# Altium PCB HGD_MCU(v0.1)-20200807.PcbDoc
Units mm, origin at the board's own origin, x right, y up, seen from the top; angles counter-clockwise.
Board outline 57.5 x 62.5 mm, 2 copper layers (TopLayer, BottomLayer); 55 components, 43 nets, 248 pads, 448 vias.
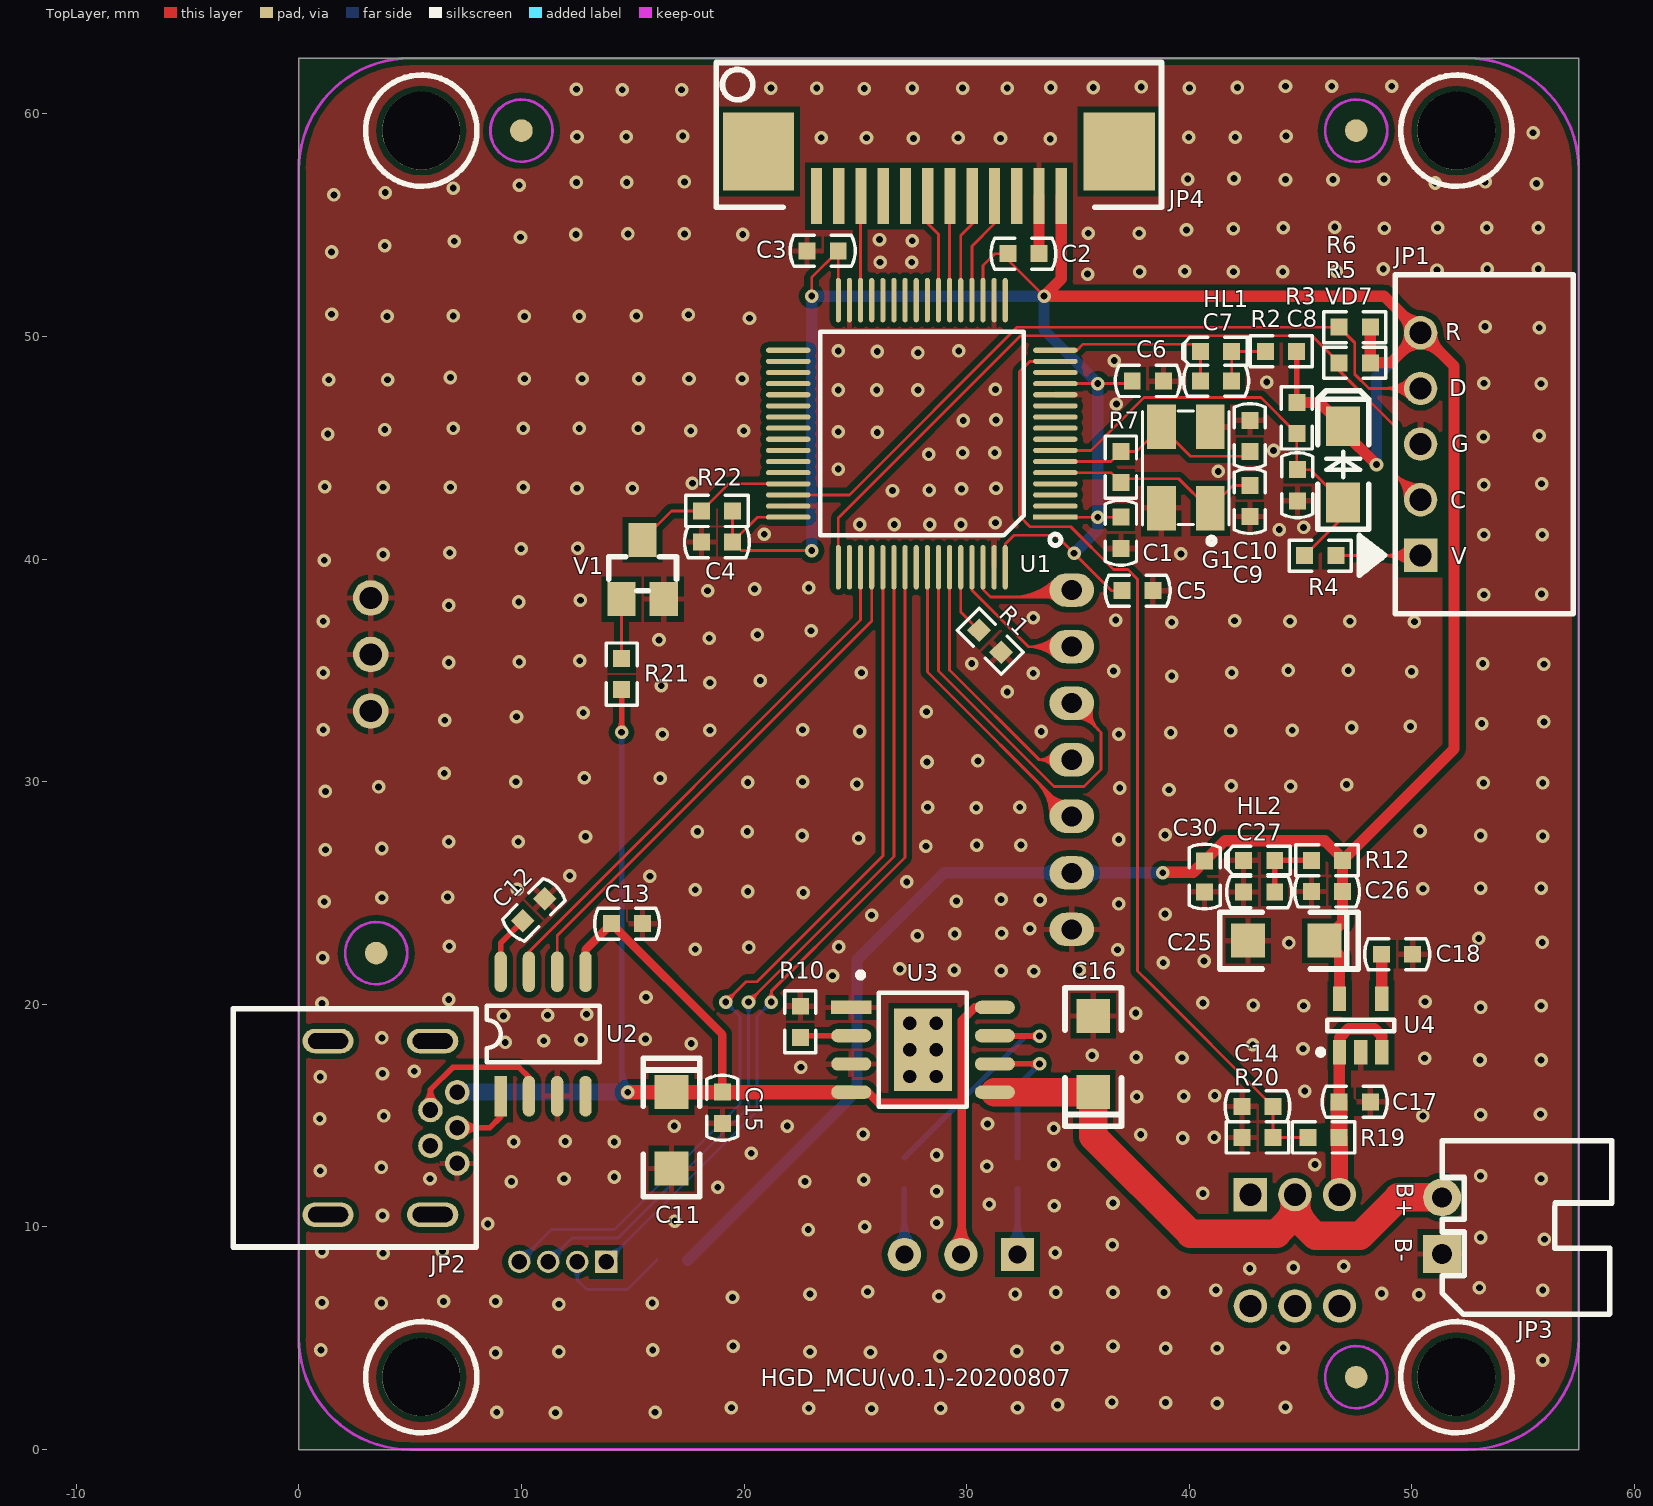
[diagram p0: TopLayer view]
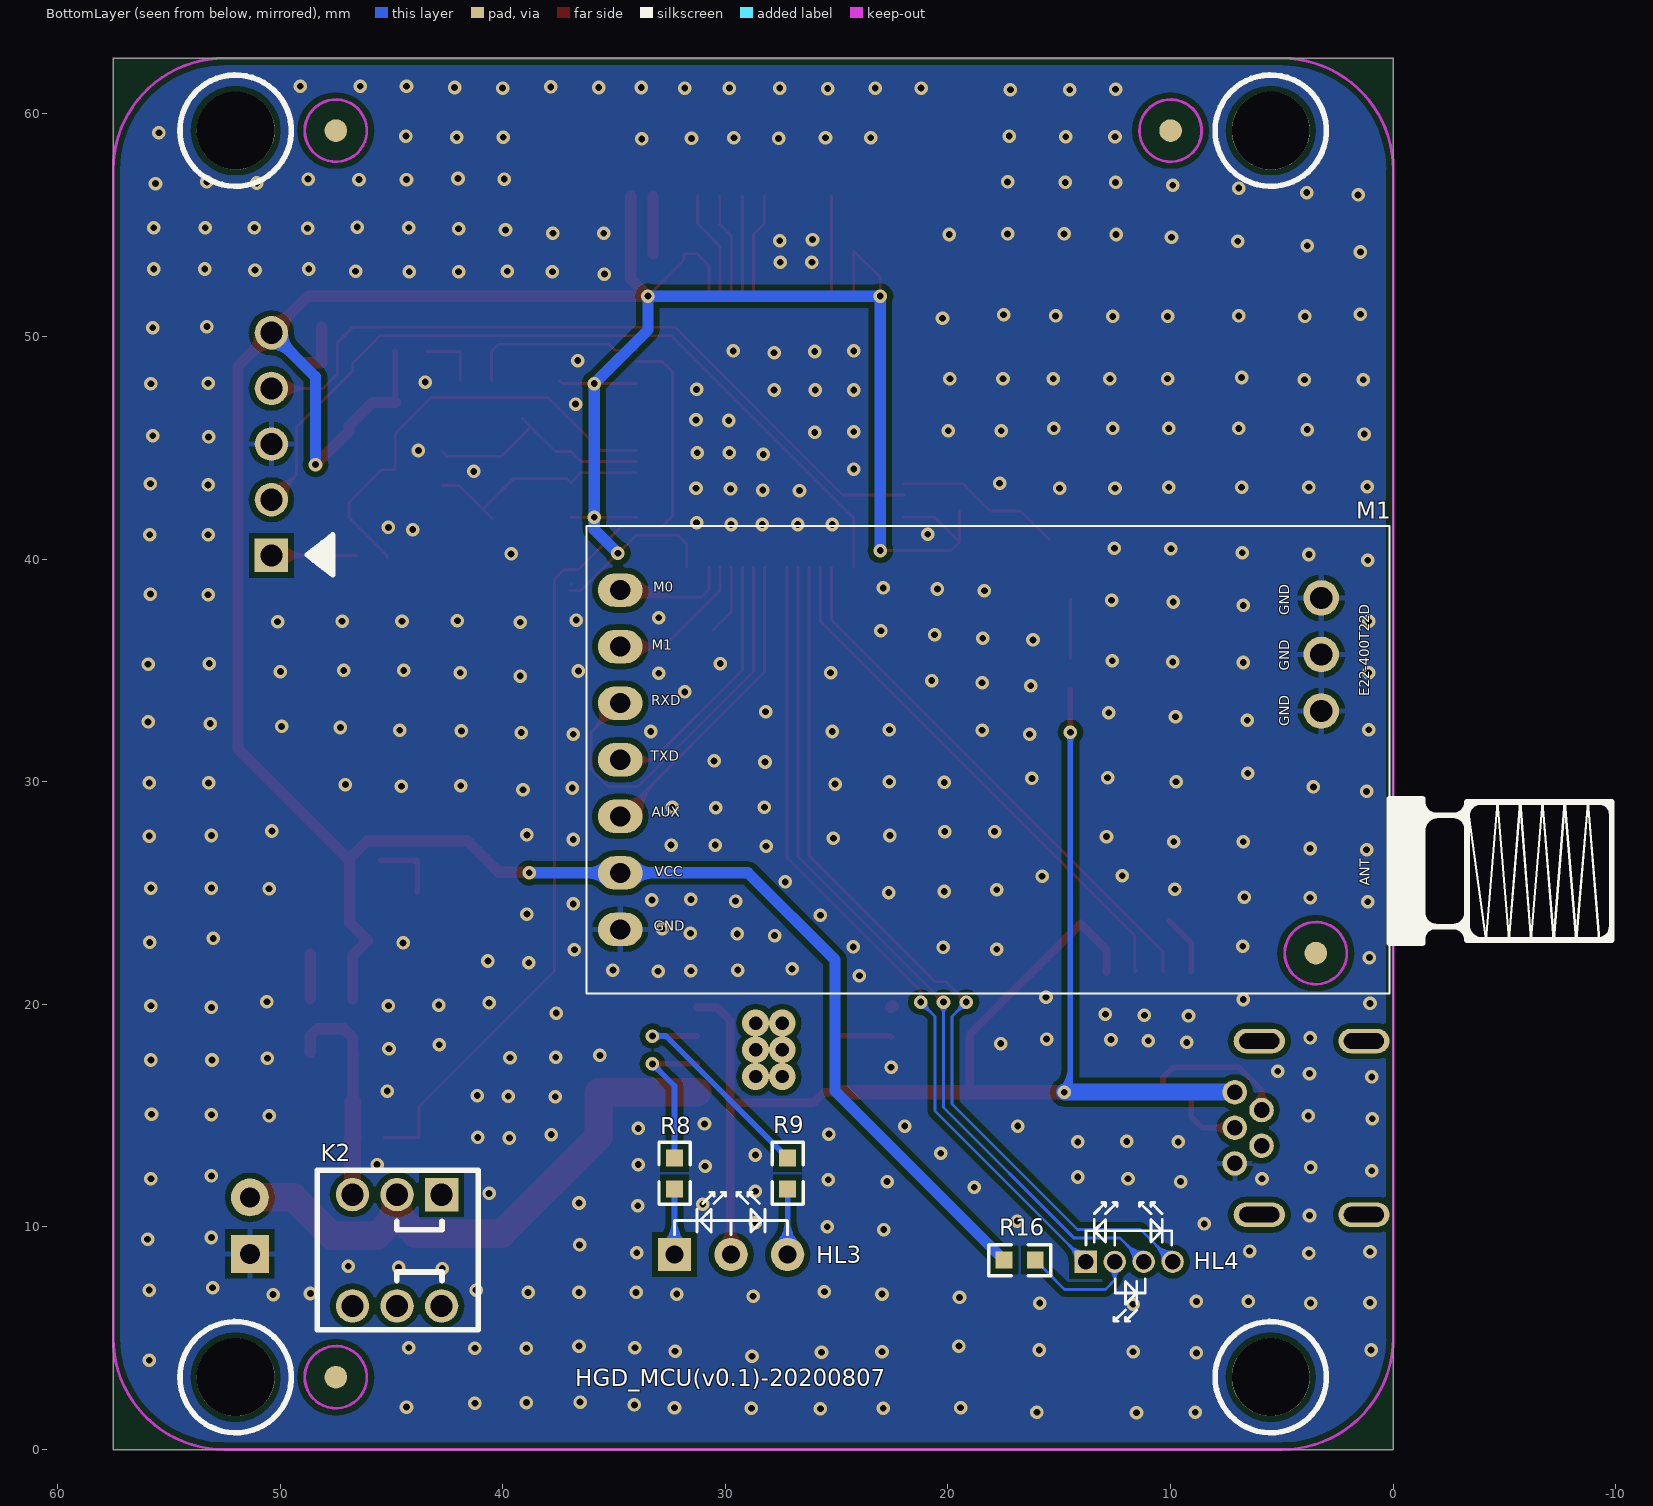
[diagram p1: BottomLayer view, seen from below]

## Layer stack, top to bottom
TopLayer: signal copper 0.0356
Dielectric: core 0.32, FR-4, Dk 4.8
BottomLayer: signal copper 0.0356

## Board outline
0,0 57.5,0 57.5,62.5 0,62.5 0,0

## Design rules (kind name [scope] priority, off if disabled: settings)
Clearance Clearance_2 [InNet('RF_IN') vs InNet('GND')] p1: gap=0.5
Clearance [All] p2: gap=0.254
Clearance Clearance_1 [All] p3: gap=0.254
ComponentClearance [All] p1 off: gap=0.254 collisioncheckmode=3 verticalgap=0.254 showdistances=FALSE
FabricationTestPointUsage TestPointUsage [All] p1: valid=0 allowmultiple=FALSE
FabricationTestpoint Testpoint [(IsPad And (OnTopLayer Or OnBottomLayer))] p1: side=3 testpointundercomponent=TRUE minsize=1.016 maxsize=2.54 preferedsize=1.524 minholesize=0.508 maxholesize=1.016 preferedholesize=0.813 testpointgrid=0.025 allowsidetop=TRUE allowsidebottom=TRUE usegrid=TRUE gridtolerance=0
HoleSize [All] p1: absolutevalues=TRUE maxlimit=5.08 minlimit=0.025 maxpercent=80.000 minpercent=20.000
PolygonConnect [IsVia] p1: connectstyle=Direct reliefconductorwidth=0.254 reliefentries=4 polygonreliefangle="90 Angle"
PolygonConnect PolygonConnect_via [All] p2 off: connectstyle=Relief reliefconductorwidth=0.254 reliefentries=4 polygonreliefangle="90 Angle"
RoutingVias [All] p1: holewidth=0.4 width=0.8 viastyle="Through Hole" minholewidth=0.3 minwidth=0.6 maxholewidth=0.5 maxwidth=1
ShortCircuit [All] p1 off: allowed=FALSE
SilkscreenOverComponentPads [All] p1: minsilkscreentomaskgap=0.254
SolderMaskExpansion [All] p1: expansion=0.102
Width [All] p1: maxlimit=2.54 minlimit=0.127 preferedwidth=0.254
22 further rules are at their usual default settings.

## Components (designator, comment, footprint, x,y, rotation, side; value= is the part's Value field where it differs from the comment)
C1 "100nF/25V/5%" C0603 36.932,40.488 r90 top
C2 "100nF/25V/5%" C0603 31.852,53.721 r0 top
C3 "100nF/25V/5%" C0603 24.232,53.848 r180 top
C4 "100nF/25V/5%" C0603 18.085,40.767 r0 top
C5 "100nF/25V/5%" C0603 38.379,38.583 r180 top
C6 "100nF/25V/5%" C0603 38.837,48.006 r180 top
C7 "100nF/25V/5%" C0603 41.906,48.012 r180 top
C8 "100nF/25V/5%" C0603 44.856,44.018 r270 top
C9 "20pF/25V/1%" C0603 42.723,41.91 r90 top
C10 "20pF/25V/1%" C0603 42.723,44.831 r90 top
C11 "10uF/25V/5%" C1206-1 16.739,16.053 r270 top
C12 "100nF/25V/5%" C0603 11.049,24.74 r225 top
C13 "100nF/25V/5%" C0603 14.046,23.622 r0 top
C14 "100nF/25V/5%" C0603 43.764,15.418 r180 top
C15 "100nF/25V/5%" C0603 19.025,16.053 r270 top
C16 "10uF/25V/5%" C1206-1 35.687,16.053 r90 top
C17 "100nF/25V/5%" C0603 46.736,15.621 r0 top
C18 "10nF/25V/5%" C0603 50.038,22.25 r180 top
C25 "2.2uF/25V/5%" C1206-1 46.076,22.86 r180 top
C26 "100nF/25V/5%" C0603 45.491,25.07 r0 top
C27 "100nF/25V/5%" C0603 43.84,25.044 r180 top
C30 "100nF/25V/5%" C0603 40.691,25.044 r90 top
G1 "16MHz" OSC5032 40.945,42.291 r90 top
HL1 "LED蓝灯" LED0603 41.906,49.333 r180 top
HL2 "LED蓝灯" LED0603 43.84,26.467 r180 top
HL3 "LED双色" LED2_Common_Anode 32.283,8.763 r180 bottom locked
HL4 "LED3_RGB" LED3_Common_Anode 13.806,8.433 r180 bottom
JP1 "SWD" XH2.54-5AW 50.394,37.668 r90 top
JP2 "MiniUSB-B" MiniUSB-B 7.112,14.453 r270 top locked
JP3 "XH2.54-2P" XH2.54-2AW 51.359,10.058 r90 top
JP4 "FPC-12P" FPC-1.0MM-12P-W 28.753,56.312 r0 top locked
K2 "SW-2" BTN-7*7 42.748,6.452 r0 bottom locked
M1 "E22-400T22D" E22-400T22D 34.722,38.608 r180 bottom locked
R1 "10K/5%" R0603 31.547,35.814 r135 top
R2 "10K/5%" R0603 44.827,49.333 r180 top
R3 "10K/5%" R0603 44.831,45.644 r90 top
R4 "1K/5%" R0603 46.584,40.157 r180 top
R5 "10K/5%" R0603 46.736,48.819 r0 top
R6 "10K/5%" R0603 46.736,50.419 r0 top
R7 "1M/1%" R0603 36.932,43.434 r90 top
R8 "1K/5%" R0603 32.283,13.106 r270 bottom
R9 "1K/5%" R0603 27.203,13.106 r270 bottom
R10 "1K5/5%" R0603 22.53,19.914 r270 top
R12 "2K/5%" R0603 46.888,26.467 r180 top
R16 "10K/5%" R0603 17.475,8.509 r180 bottom
R19 "10M/1%" R0603 46.736,14.021 r180 top
R20 "10M/1%" R0603 43.764,14.021 r180 top
R21 "10K/5%" R0603 14.503,35.535 r270 top
R22 "1K/5%" R0603 19.482,42.164 r180 top
U1 "STM32F105RCT6" LQFP64_STM32F105R 33.985,41.885 r180 top locked
U2 "CH340N" CH340N_SOP8 9.068,15.875 r0 top
U3 "TP4056" TP4056_SOP8_SOP127P600X175-8N 28.042,17.958 r0 top
U4 "TPS73033DBVR" SGM2019_SOT23-5_95P280X125-5N 47.701,19.05 r90 top
V1 "S8050" SOT-23 15.443,40.869 r0 top
VD7 "1N4148" LL-34 46.914,42.545 r90 top

## Footprints (in the part's own frame and the unit in brackets; to place one, negate y for a bottom-side part, rotate by r counter-clockwise, add the part's x,y. Pads: shape width x height; smd on the part's side, far side on the other; paste and mask are expansions set on the pad)
BTN-7*7 [mm] "自锁开关"
  rect 1.5x1.5 hole 1: 1(0,-5)
  round 1.5 hole 1: 2(2,-5) 3(4,-5) 4(0,0) 5(2,0) 6(4,0)
  silkscreen extent -1.65,-6.1 5.59,1.07
C0603 [mil]
  rect 30x30 smd: 1(0,0) 2(55,0)
  silkscreen extent -30,-28 85,28
C1206-1 [mil] "C1206封装钽电容"
  rect 60x60 smd: 1(0,0) 2(135,0)
  silkscreen extent -60,-50 185,50
CH340N_SOP8 [mil]
  rect 22x72 smd: 1(0,0)
  oval 22x72 smd: 2(50,0) 3(100,0) 4(150,0) 5(150,220) 6(100,220) 7(50,220) 8(0,220)
  silkscreen extent -25,60 175,160
E22-400T22D [mm]
  oval 2x1.5 hole 0.9: 1(0,0) 2(0,-2.54) 3(0,-5.08) 4(0,-7.62) 5(0,-10.16) 6(0,-12.7) 7(0,-15.24)
  round 1.6 hole 1: 8(31.49,-5.43) 9(31.49,-2.89) 10(31.49,-0.35)
  silkscreen extent -1.51,-18.12 44.54,2.88
FPC-1.0MM-12P-W [mm] "FPC-1.0MM-12P-W：卧式，抽拉式上接，12P"
  rect 3.2x3.5 smd: 0(-8.1,2) 0(8.1,2)
  rect 0.5x2.5 smd: 1(-5.5,0) 2(-4.5,0) 3(-3.5,0) 4(-2.5,0) 5(-1.5,0) 6(-0.5,0) 7(0.5,0) 8(1.5,0) 9(2.5,0) 10(3.5,0) 11(4.5,0) 12(5.5,0)
  silkscreen extent -10,-0.5 10,6
LED2_Common_Anode [mm] "LED2_Common_Anode：双色3mm共阳极LED"
  rect 1.5x1.5 hole 0.8: 1(0,0)
  round 1.5 hole 0.8: 2(2.54,0) 3(5.08,0)
  silkscreen extent 0,0.89 5.08,2.79
LED3_Common_Anode [mm] "LED2_Common_Anode：三色5mm共阳极LED"
  rect 1x1 hole 0.7: 1(0,0)
  round 1 hole 0.7: 2(1.3,0) 3(2.6,0) 4(3.9,0)
  silkscreen extent 0,-2.67 3.86,2.67
LED0603 [mil]
  rect 30x30 smd: A(0,0) K(55,0)
  silkscreen extent -28,-25 87,25
LL-34 [mil] "开关二极管LL-34封装"
  rect 70x60 smd: A(0,0) K(135,0)
  silkscreen extent -48,-45 198,45
LQFP64_STM32F105R [mm]
  rect 2x0.229 smd: 1(0,0)
  oval 2x0.229 smd: 2(0,-0.5) 3(0,-1) 4(0,-1.5) 5(0,-2) 6(0,-2.5) 7(0,-3) 8(0,-3.5) 9(0,-4) 10(0,-4.5) 11(0,-5) 12(0,-5.5) 13(0,-6) 14(0,-6.5) 15(0,-7) 16(0,-7.5) 33(12,-7.5) 34(12,-7) 35(12,-6.5) 36(12,-6) 37(12,-5.5) 38(12,-5) 39(12,-4.5) 40(12,-4) 41(12,-3.5) 42(12,-3) 43(12,-2.5) 44(12,-2) 45(12,-1.5) 46(12,-1) 47(12,-0.5) 48(12,0)
  oval 0.229x2 smd: 17(2.25,-9.75) 18(2.75,-9.75) 19(3.25,-9.75) 20(3.75,-9.75) 21(4.25,-9.75) 22(4.75,-9.75) 23(5.25,-9.75) 24(5.75,-9.75) 25(6.25,-9.75) 26(6.75,-9.75) 27(7.25,-9.75) 28(7.75,-9.75) 29(8.25,-9.75) 30(8.75,-9.75) 31(9.25,-9.75) 32(9.75,-9.75) 49(9.75,2.25) 50(9.25,2.25) 51(8.75,2.25) 52(8.25,2.25) 53(7.75,2.25) 54(7.25,2.25) 55(6.75,2.25) 56(6.25,2.25) 57(5.75,2.25) 58(5.25,2.25) 59(4.75,2.25) 60(4.25,2.25) 61(3.75,2.25) 62(3.25,2.25) 63(2.75,2.25) 64(2.25,2.25)
  silkscreen extent -0.25,-8.32 10.57,1.27
MiniUSB-B [mm]
  oval 1.1x2.3 hole 0.7 slot 1.8 at 90 deg: 0(-3.9,-1.1) 0(-3.9,-5.8) 0(3.9,-1.1) 0(3.9,-5.8)
  round 1.1 hole 0.7: 1(-1.6,0) 2(-0.8,-1.2) 3(0,0) 4(0.8,-1.2) 5(1.6,0)
  silkscreen extent -5.35,-10.05 5.35,0.85
OSC5032 [mm]
  rect 2x1.3 smd: 1(0,0) 2(3.65,0) 3(3.65,2.2) 4(0,2.2)
  silkscreen extent -1.62,-0.84 4.37,3.05
R0603 [mil]
  rect 30x30 smd: 1(0,0) 2(55,0)
  silkscreen extent -28,-28 82,28
SGM2019_SOT23-5_95P280X125-5N [mm] "SOT23, 5-Leads, Body 3.0x3.0mm (max), Pitch 0.95mm, IPC Medium Density"
  rect 1.1x0.6 smd: 1(-1.2,0.95) 2(-1.2,0) 3(-1.2,-0.95) 4(1.2,-0.95) 5(1.2,0.95)
  silkscreen extent -1.32,-1.5 0.25,1.92, body extent -0.85,-1.51 0.85,1.51, height 1.25
SOT-23 [mil]
  rect 50x60 smd: B(-37.5,-105) C(0,0) E(37.5,-105)
  silkscreen extent -60,-90 60,-30
TP4056_SOP8_SOP127P600X175-8N [mm] "SOP, 8-Leads, Body 5.1x4.0mm (max), Pitch 1.27mm, IPC Medium Density"
  rect 2.6x3.7 smd: 0(0,0)
  rect 1.8x0.6 smd: 1(-3.225,1.905)
  oval 1.8x0.6 smd: 2(-3.225,0.635) 3(-3.225,-0.635) 4(-3.225,-1.905) 5(3.225,-1.905) 6(3.225,-0.635) 7(3.225,0.635) 8(3.225,1.905)
  silkscreen extent -2.93,-2.57 1.96,3.49, body extent -2,-2.55 2,2.55, height 1.75
XH2.54-2AW [mm] "2.54mm间距, 2P, 弯针插座"
  rect 1.7x1.7 hole 0.9: 1(-1.27,0)
  round 1.7 hole 0.9: 2(1.27,0)
  silkscreen extent -3.99,-7.62 3.81,0, body extent -3.77,-7.35 3.77,0.35, height 5.73
XH2.54-5AW [mm] "XH2.54-5P弯针插座"
  rect 1.5x1.5 hole 1: 1(2.5,0)
  round 1.5 hole 1: 2(5,0) 3(7.5,0) 4(10,0) 5(12.5,0)
  silkscreen extent -0.13,-6.86 15.1,2.75

## Part data
C1 C2 C3 C4 C5 C6 C8: library part CAP-SMD, "电容"
C7 C9 C10 C27: library part CAP, "电容"
C11 C16 C25: library part "Cap Pol1", "钽电容"
C12 C13 C15 C18 C26 C30: library part Cap, "电容"
C14 C17: library part CAP-SMD
G1: library part CRYSTAL_4, "两对电极压电晶体"
HL1 HL2: library part 发光二极管, "发光二极管"
HL3: library part LED2_Common_Anode, "LED2_Common_Anode：双色LED，共阳极"
HL4: library part LED3_Common_Anode, "LED3_Common_Anode：三色共阳极LED"
JP1: library part JP_XH2.54-5AW, "XH2.54-5P直插插针"
JP2: "MiniUSB-B母头插座"
JP3: library part XH2.54-2AW, "XH2.54-2P弯针插座"
K2: "SW-2：2通道自锁开关"
M1: "E22-400T22D LoRa模块"
R1 R2 R3 R4 R5 R6 R7 R8 R9 R10 R12 R16 R19 R20 R21 R22: library part RES2, "电阻"
U4: library part SGM2019, "SGM2019：Low Power, Low Dropout, RF Linear Regulators"
V1: library part NPN, "NPN三极管"
VD7: library part 开关二极管, "开关二极管"

## Free pads (board coordinates)
  round 1.016 smd far side: 0(3.475,22.3) 0(10,59.25) 0(47.5,59.25) 0(47.5,3.25)
  round 3.5 hole 3.5: 0(5.5,3.25) 0(5.5,59.25) 0(52,3.25) 0(52,59.25)
  round 1.016 smd: 1(3.475,22.3) 1(10,59.25) 1(47.5,59.25) 1(47.5,3.25)
  round 2.54 on Bottom Solder: 2(3.475,22.3) 2(10,59.25) 2(47.5,59.25) 2(47.5,3.25)
  round 2.54 on Top Solder: 3(3.475,22.3) 3(10,59.25) 3(47.5,59.25) 3(47.5,3.25)

## Via types
v1: diameter 0.61, hole 0.305, TopLayer to BottomLayer, tented both sides, 442 vias
v2: diameter 1.2, hole 0.6, TopLayer to BottomLayer, tented both sides, 6 vias

## Nets (pads, with @x,y where several pads share a name; then routed paths per layer and width w, separated by ;. In a path a pad name is that pad's centre, name@x,y a point inside that pad or via, vN(x,y) a via of type N, cw(c..) or ccw(c..) an arc to the next point about the centre after c; other vN are vias at no path point)
3V3: C1.2 C2.1 C3.1 C4.2 C5.2 C6.2 C25.1 C26.2 C30.2 JP1.5 JP4.12 M1.6 R2.1 R3.2 R5.2 R6.2 R12.1 R16.1 R22.1 U1.1 U1.13 U1.19 U1.32 U1.48 U1.64 U4.5 VD7.K | length 193.5
  TopLayer w0.127: R22.1 C4.2 ; U1.48 20.599,41.885 C4.2 ; v1(23.038,40.386) 19.863,40.386 C4.2 ; v1(23.038,51.816) 23.038,52.654 C3.1 24.235,53.844 U1.32 ; U1.19 30.735,53.185 31.271,53.721 C2.1 31.852,53.442 v1(33.477,51.816) ; U1.64 31.735,40.676 32.131,41.072 34.018,41.072 v1(34.827,40.263) 36.507,38.583 C5.2 ; U1.1 v1(35.89,41.885) C1.2 ; U1.13 v1(35.89,47.885) 37.318,47.885 C6.2 ; C5.2@36.932,38.837 C5.2@36.932,38.874
  TopLayer w0.254: R2.1 44.827,47.045 R3.2
  TopLayer w0.508: JP4.12 34.253,52.592 v1(33.477,51.816) 48.746,51.816 JP1.5 ; v1(38.811,25.908) 38.837,25.933 40.183,25.933 C30.2 41.605,27.356 46.083,27.356 46.888,26.55 R12.1 ; R3.2 45.847,47.041 VD7.K 46.914,45.745 v1(48.412,44.247) ; U4.5 46.751,22.184 C25.1 46.888,23.673 C26.2 R12.1 ; R6.2 R5.2 49.044,48.819 JP1.5 ; JP1.5@50.394,50.664 cw(c50.394,51.862) 49.547,51.015 cw(c48.7,50.168) 49.898,50.168 cw(c48.7,50.168) 49.547,49.321 cw(c50.394,48.475) 50.394,49.672 cw(c50.394,48.475) 51.24,49.321 cw(c52.087,50.168) JP1.5@50.89,50.168 ; R12.1 51.892,31.471 51.892,48.67 JP1.5
  BottomLayer w0.508: R16.1 25.075,16.109 25.075,22 28.983,25.908 M1.6 v1(38.811,25.908) ; v1(23.038,40.386) v1(23.038,51.816) v1(33.477,51.816) 33.477,50.298 v1(35.89,47.885) v1(35.89,41.885) 35.89,41.326 v1(34.827,40.263) ; M1.6@34.121,25.557 ccw(c33.274,24.711) 33.274,25.908 ccw(c33.274,27.105) M1.6@34.121,26.259 ; M1.6@35.323,25.557 cw(c36.169,24.711) 36.169,25.908 cw(c36.169,27.105) M1.6@35.323,26.259 ; v1(48.412,44.247) 48.412,48.187 JP1.5 ; JP1.5@49.898,50.168 cw(c48.7,50.168) 49.547,49.321 cw(c50.394,48.475) JP1.5@50.394,49.672
+5V: C11.1 C13.1 C15.1 HL3.2 JP2.1 R21.2 U2.5 U3.4 U3.8 | length 71.8
  TopLayer w0.254: v1@14.374,32.351 ccw(c14.063,32.662) 14.503,32.662 ; v1(14.5,32.225) 14.503,32.228 R21.2 ; 14.503,32.646 ccw(c14.921,32.646) v1@14.626,32.351
  TopLayer w0.381: U2.5 12.878,22.454 C13.1 ; 14.775,22.893 C13.1 ; C15.1 19.025,18.644 C13.1 ; U3.4 25.572,16.053 26.05,15.575 29.786,15.575 ; HL3.2@29.348,9.159 ccw(c28.29,10.217) 29.786,10.217 ; HL3.2 29.786,8.806 29.786,15.886 29.786,19.286 30.363,19.863 U3.8 ; 29.786,10.011 ccw(c30.991,10.011) HL3.2@30.139,9.159
  TopLayer w0.635: v1(14.775,16.05) 14.778,16.053 C11.1 C15.1 U3.4
  BottomLayer w0.254: v1@14.374,32.099 cw(c14.071,31.796) 14.5,31.796 cw(c14.929,31.796) v1@14.626,32.099 ; 14.5,16.53 ccw(c15.255,16.53) v1@14.721,15.996 ; 14.5,17.143 ccw(c15.868,17.143) v1@14.901,16.176 ; v1(14.5,32.225) 14.5,16.325 14.772,16.053 v1(14.775,16.05)
  BottomLayer w0.762: JP2.1 v1@14.772,16.053
ADC_CO: JP4.8 U1.21 | length 4.9
  TopLayer w0.127: U1.21 29.735,54.532 30.253,55.05 JP4.8
ADC_H2S: JP4.7 U1.22 | length 4.7
  TopLayer w0.127: U1.22 29.235,56.294 JP4.7
ADC_LEL: JP4.6 U1.23 | length 4.9
  TopLayer w0.127: JP4.6 28.253,55.075 28.735,54.593 U1.23
ADC_O2: JP4.9 U1.20 | length 5.1
  TopLayer w0.127: U1.20 30.235,54.057 31.253,55.075 JP4.9
ADC_VOLT: C14.1 R19.2 R20.1 U1.15 | length 44.2
  TopLayer w0.127: U1.15 32.835,48.885 32.375,48.425 32.375,41.931 32.854,41.453 34.675,41.453 36.592,39.535 37.241,39.535 37.681,39.095 37.681,21.501 38.236,20.946 ; 38.062,21.12 38.236,20.946 ; R19.2 R20.1 C14.1 38.236,20.946
BATT+: C16.1 JP3.2 K2.2 U3.5 | length 29.1
  TopLayer w1.27: U3.5 C16.1 35.687,14.063 40.05,9.7 43.925,9.7 44.748,10.523 K2.2 ; 44.389,10.164 ccw(c43.577,10.977) K2.2@44.642,11.408 ; 44.748,10.527 45.675,9.6 47.664,9.6 49.392,11.328 JP3.2 ; K2.2@44.859,11.42 ccw(c46.193,11.043) 45.213,10.062
BATT_OUT: C17.1 K2.3 R19.1 U4.1 U4.3 | length 10
  TopLayer w0.508: C17.1 46.736,17.835 U4.1 46.751,18.501 47.158,18.908 48.317,18.908 48.651,18.574 U4.3
  TopLayer w0.762: C17.1 R19.1 46.748,14.009 K2.3
BEEP: JP4.3 U1.30 | length 4.7
  TopLayer w0.127: U1.30 25.235,56.294 JP4.3
BOOT0: R1.2 U1.60 | length 3.2
  TopLayer w0.127: U1.60 29.735,37.626 R1.2
CHECK_POWER: R22.2 U1.45 V1.C | length 7.6
  TopLayer w0.127: V1.C 16.739,42.164 R22.2 19.304,43.383 21.984,43.383 U1.45
DEBUG_RX: U1.52 U2.6 | length 24.1
  TopLayer w0.127: U2.6@11.544,21.526 U2.6 11.608,23.094 25.735,37.221 U1.52
DEBUG_TX: U1.51 U2.7 | length 24.3
  TopLayer w0.127: U2.7 10.338,22.363 25.235,37.26 U1.51
DGND: C1.1 C2.2 C3.2 C4.1 C5.1 C6.1 C8.2 C9.1 C10.2 C11.2 C12.1 C13.2 C14.2 C15.2 C16.2 C17.2 C18.1 C25.2 C26.1 C27.2 C30.1 G1.2 G1.4 HL2.K JP1.3 JP2.5 JP3.1 JP4.11 M1.7 M1.8 M1.9 M1.10 R1.1 R10.1 R20.2 U1.12 U1.18 U1.31 U1.47 U1.63 U2.3 U3.1 U3.3 U4.2 V1.E | length 2.7
  TopLayer w0.508: R10.1@22.446,19.914 R10.1 R10.1@22.581,19.863 ; C2.2 33.253,53.725 JP4.11
  other v1: 11.532,1.651 8.89,1.676 16.002,1.676 25.73,1.829 22.911,1.854 28.829,1.854 19.431,1.88 32.283,1.88 44.323,1.905 34.087,2.007 41.25,2.083 38.938,2.108 36.525,2.134 55.88,4.013 28.804,4.191 8.839,4.343 25.679,4.369 11.684,4.394 22.962,4.394 32.258,4.42 0.991,4.47 15.9,4.47 38.938,4.547 41.25,4.547 34.061,4.572 44.221,4.572 19.507,4.648 36.576,4.648 11.684,6.528 3.708,6.579 15.875,6.579 1.041,6.604 6.502,6.655 8.839,6.655 19.482,6.833 28.753,6.883 50.317,6.96 22.962,6.985 32.182,6.985 48.641,7.01 34.011,7.061 36.576,7.061 38.862,7.061 25.552,7.087 41.199,7.163 55.88,7.163 53.035,7.264 42.723,8.128 44.679,8.179 46.939,8.23 3.785,8.814 33.985,8.839 1.041,8.89 6.452,8.915 36.551,9.195 55.956,9.449 53.086,9.525 22.885,9.881 25.425,10.008 8.484,10.135 28.651,10.185 16.891,10.262 3.759,10.516 33.934,10.947 31.013,11.024 36.576,11.074 40.615,11.506 28.651,11.608 18.821,11.786 9.55,12.04 22.733,12.04 25.375,12.116 5.893,12.167 11.913,12.167 55.804,12.167 14.173,12.243 53.086,12.294 0.965,12.522 3.708,12.675 30.912,12.725 33.909,12.802 45.644,12.802 28.651,13.233 20.32,13.31 9.652,13.818 14.173,13.818 11.963,13.843 39.7,13.995 41.123,14.021 37.821,14.148 25.349,14.173 33.909,14.427 16.866,14.529 21.946,14.529 30.937,14.63 0.94,14.859 3.81,14.986 50.495,14.986 53.086,15.037 55.778,15.062 37.643,15.85 39.751,15.875 41.148,15.9 45.187,16.104 0.965,16.739 3.759,16.891 5.182,16.993 22.555,17.17 53.061,17.501 55.804,17.501 50.571,17.577 39.675,17.602 37.617,17.628 35.636,17.704 45.11,18.009 42.85,18.186 17.628,18.237 9.271,18.288 10.998,18.364 12.675,18.415 15.57,18.44 3.734,18.491 9.195,19.482 11.176,19.507 12.929,19.558 37.592,19.609 53.086,19.863 45.136,19.939 55.804,19.939 42.875,19.964 1.041,20.041 40.615,20.066 50.597,20.117 6.731,20.218 15.596,20.32 23.978,21.285 33.02,21.488 31.547,21.514 29.439,21.539 35.052,21.539 27,21.59 38.837,21.869 40.665,21.946 1.067,22.098 36.779,22.454 17.805,22.479 20.218,22.555 24.257,22.581 6.756,22.606 44.475,22.758 55.855,22.784 53.01,22.962 27.788,23.089 29.464,23.165 31.572,23.19 32.842,23.393 25.73,24.003 38.913,24.054 36.83,24.511 1.143,24.613 29.54,24.638 33.299,24.689 31.547,24.714 3.734,24.79 6.68,24.816 22.657,25.019 20.168,25.07 17.805,25.146 9.804,25.171 50.495,25.197 53.086,25.222 55.804,25.222 27.305,25.502 15.773,25.756 12.167,25.781 1.194,26.949 3.734,27 28.169,27.102 30.455,27.153 32.436,27.153 6.731,27.305 9.855,27.305 36.83,27.407 25.146,27.457 12.878,27.534 55.88,27.559 22.606,27.584 53.086,27.584 38.913,27.61 17.907,27.762 20.142,27.762 50.368,27.788 30.429,28.829 28.245,28.854 32.385,28.854 1.194,29.566 39.091,29.642 36.881,29.718 3.581,29.769 44.552,29.794 41.885,29.82 47.066,29.87 25.07,29.896 53.213,29.947 55.88,29.947 20.168,29.972 9.754,29.997 22.631,29.997 16.231,30.15 12.827,30.175 6.528,30.378 28.219,30.886 30.505,30.937 16.332,32.131 36.83,32.131 39.167,32.207 25.197,32.258 33.35,32.258 41.859,32.283 18.466,32.309 44.628,32.309 1.092,32.334 22.631,32.334 47.295,32.436 49.936,32.487 53.137,32.614 55.931,32.69 6.553,32.766 9.779,32.918 12.776,33.096 28.194,33.147 31.826,34.036 16.281,34.315 18.466,34.442 20.726,34.544 39.218,34.747 32.995,34.874 1.092,34.9 25.273,34.9 41.91,34.9 49.987,34.95 36.601,34.976 44.45,35.001 47.142,35.001 55.931,35.281 30.226,35.306 53.188,35.306 6.731,35.357 9.906,35.382 12.624,35.433 16.18,36.373 18.44,36.449 20.599,36.601 23.012,36.779 39.218,37.16 50.114,37.186 1.092,37.211 44.526,37.211 47.219,37.211 42.037,37.236 36.703,37.262 32.995,37.363 6.731,37.922 9.881,38.075 12.649,38.151 53.238,38.405 55.829,38.43 18.364,38.583 20.472,38.659 22.911,38.71 1.143,39.954 3.785,40.208 39.624,40.234 6.782,40.284 9.982,40.462 12.522,40.488 53.238,41.097 55.855,41.097 20.904,41.123 44.044,41.326 45.136,41.427 25.197,41.554 26.746,41.554 28.346,41.554 29.743,41.554 31.293,41.631 26.67,43.078 28.321,43.104 29.769,43.155 12.497,43.18 14.986,43.18 31.318,43.18 3.785,43.231 6.807,43.231 10.084,43.231 1.168,43.256 53.238,43.332 55.829,43.383 17.678,43.409 41.3,43.942 24.232,44.044 28.296,44.704 29.82,44.78 31.267,44.78 43.79,44.882 53.213,45.491 55.728,45.542 1.295,45.618 25.984,45.695 24.232,45.72 17.602,45.771 19.99,45.771 3.861,45.822 6.934,45.872 10.084,45.872 12.598,45.872 15.24,45.872 29.845,46.228 31.318,46.253 36.728,46.965 24.232,47.6 25.959,47.6 27.813,47.6 31.293,47.625 55.804,47.879 53.238,47.904 43.485,47.955 1.346,48.057 3.988,48.057 10.135,48.108 12.725,48.108 15.265,48.108 17.526,48.108 19.914,48.108 6.807,48.158 36.627,48.92 27.813,49.276 25.984,49.327 24.232,49.352 29.642,49.352 55.728,50.394 53.289,50.444 20.244,50.825 3.962,50.902 10.135,50.902 12.598,50.902 6.934,50.927 15.164,50.927 17.501,50.978 1.473,51.003 35.433,52.807 37.77,52.908 41.986,52.908 44.196,52.908 39.802,52.934 46.609,52.934 51.13,52.984 48.717,53.035 53.391,53.035 55.677,53.035 26.111,53.34 27.534,53.34 1.473,53.797 3.861,54.077 6.985,54.28 27.559,54.305 26.086,54.356 9.957,54.458 12.446,54.585 19.939,54.585 14.783,54.61 17.323,54.61 35.458,54.635 37.744,54.635 39.878,54.788 41.986,54.839 48.768,54.864 44.221,54.889 51.156,54.889 53.365,54.889 55.677,54.889 46.533,54.915 1.575,56.363 3.886,56.464 6.934,56.667 9.906,56.794 55.601,56.871 51.054,56.896 12.471,56.921 14.732,56.921 17.323,56.947 53.289,56.947 44.323,57.048 46.457,57.048 39.929,57.074 48.743,57.074 42.012,57.099 33.757,58.877 27.61,58.903 31.521,58.903 23.47,58.928 25.502,58.928 29.616,58.928 39.98,58.953 42.062,58.953 12.497,58.979 14.707,58.979 17.247,59.004 44.348,59.004 55.448,59.157 14.529,61.087 17.196,61.087 12.471,61.112 25.4,61.138 21.209,61.163 23.266,61.163 27.559,61.163 29.82,61.163 31.826,61.163 40.005,61.163 33.782,61.189 35.687,61.189 42.164,61.189 37.846,61.214 44.323,61.239 46.406,61.239 49.098,61.239
E22_AUX: M1.5 U1.57 | length 29.7
  TopLayer w0.127: U1.57 28.235,34.935 M1.5 ; 33.123,30.047 cw(c31.524,28.448) 33.785,28.448 ccw(c31.524,28.448) 33.123,30.047 ; 33.34,29.83 cw(c31.958,28.448) 33.912,28.448 ccw(c31.958,28.448) 33.34,29.83 ; 33.557,29.613 cw(c32.392,28.448) 34.039,28.448 ccw(c32.392,28.448) 33.557,29.613 ; 33.727,29.443 ccw(c34.472,30.188) 34.472,29.134 cw(c34.472,30.188) 33.727,29.443 ; 33.774,29.396 cw(c32.825,28.448) 34.166,28.448 ccw(c32.825,28.448) 33.774,29.396 ; 33.943,29.226 ccw(c34.472,29.755) 34.472,29.007 cw(c34.472,29.755) 33.943,29.226 ; 33.99,29.179 cw(c33.259,28.448) 34.293,28.448 ccw(c33.259,28.448) 33.99,29.179
  TopLayer w0.229: M1.5 M1.5@34.722,28.501
E22_M0: M1.1 U1.62 | length 14.9
  TopLayer w0.127: U1.62 30.735,38.638 31.073,38.3 34.414,38.3 M1.1 ; 32.071,38.3 ccw(c32.071,41.009) M1.1@33.986,39.093 ; 32.377,38.3 ccw(c32.377,40.702) M1.1@34.076,39.004 ; 32.684,38.3 ccw(c32.684,40.396) M1.1@34.166,38.914 ; 32.991,38.3 ccw(c32.991,40.089) M1.1@34.256,38.824 ; 33.297,38.3 ccw(c33.297,39.783) M1.1@34.346,38.734 ; 33.558,38.3 cw(c33.558,37.694) M1.1@33.986,38.123 ; 33.604,38.3 ccw(c33.604,39.476) M1.1@34.435,38.644
E22_M1: M1.2 U1.61 | length 12.9
  TopLayer w0.127: U1.61 30.235,38.599 32.767,36.068 M1.2 ; M1.2@33.986,35.583 ccw(c32.814,34.411) 32.814,36.068 ccw(c32.814,37.725) M1.2@33.986,36.553 ; M1.2@34.076,35.672 ccw(c33.121,34.717) 33.121,36.068 ccw(c33.121,37.419) M1.2@34.076,36.464 ; M1.2@34.166,35.762 ccw(c33.428,35.024) 33.428,36.068 ccw(c33.428,37.112) M1.2@34.166,36.374
E22_RX: M1.4 U1.59 | length 15.4
  TopLayer w0.127: U1.59 29.235,35.012 33.259,30.988 ; M1.4@33.883,30.635 ccw(c33.259,30.261) 33.259,30.988 ; M1.4@33.883,31.341 cw(c33.259,31.715) 33.259,30.988 ; M1.4@33.992,30.7 ccw(c33.484,30.395) 33.484,30.988 ccw(c33.484,31.581) M1.4@33.992,31.276 ; M1.4@34.101,30.766 ccw(c33.708,30.53) 33.708,30.988 ccw(c33.708,31.446) M1.4@34.101,31.21 ; M1.4 33.259,30.988
E22_TX: M1.3 U1.58 | length 23
  TopLayer w0.127: U1.58 28.735,34.973 33.929,29.779 35.273,29.779 36.039,30.546 36.039,32.21 M1.3 ; M1.3@34.972,32.841 cw(c34.972,31.788) 35.717,32.533 ; M1.3@34.972,32.968 cw(c34.972,32.221) 35.5,32.75 ; M1.3@35.268,33.451 ccw(c35.919,33.283) 35.443,32.807 ; M1.3@35.39,33.42 ccw(c36.169,33.218) 35.6,32.65 ; M1.3@35.513,33.388 ccw(c36.418,33.153) 35.757,32.493 ; M1.3@35.636,33.356 ccw(c36.667,33.089) 35.914,32.336
MCU_LED: C7.2 HL1.K U1.16 | length 8.1
  TopLayer w0.127: U1.16 34.957,49.385 35.23,49.657 40.185,49.657 40.458,49.385 HL1.K C7.2
NetC7_1: C7.1 HL1.A R2.2 | length 2.8
  TopLayer w0.127: C7.1 HL1.A R2.2
NetC12_2: C12.2 U2.8 | length 2.7
  TopLayer w0.254: U2.8 9.068,22.758 C12.2
NetC18_2: C18.2 U4.4 | length 2
  TopLayer w0.508: C18.2 48.651,22.24 U4.4
NetC27_1: C27.1 HL2.A R12.2 | length 3.1
  TopLayer w0.254: C27.1 HL2.A R12.2
NetHL3_1: HL3.1 R8.2 | length 6.7
  BottomLayer w0.254: HL3.1@31.843,9.204 ccw(c30.779,10.267) 32.283,10.267 ccw(c33.787,10.267) HL3.1@32.724,9.204 ; HL3.1@32.022,9.024 ccw(c31.393,9.654) 32.283,9.654 ccw(c33.174,9.654) HL3.1@32.544,9.024 ; HL3.1 R8.2
NetHL3_3: HL3.3 R9.2 | length 6.7
  BottomLayer w0.254: HL3.3@26.763,9.204 ccw(c25.699,10.267) 27.203,10.267 ccw(c28.707,10.267) HL3.3@27.644,9.204 ; HL3.3@26.942,9.024 ccw(c26.313,9.654) 27.203,9.654 ccw(c28.094,9.654) HL3.3@27.464,9.024 ; HL3.3 R9.2
NetHL4_2: HL4.2 R16.2 | length 7
  BottomLayer w0.127: HL4.2@12.262,8.071 cw(c11.95,7.611) 12.506,7.611 ; HL4.2@12.333,8.176 cw(c12.112,7.85) 12.506,7.85 cw(c12.9,7.85) HL4.2@12.679,8.176 ; HL4.2 12.506,7.611 ; HL4.2@12.75,8.071 ccw(c13.062,7.611) 12.506,7.611 ; R16.2 15.536,7.967 14.757,7.188 12.929,7.188 12.506,7.611
NetJP1_1: JP1.1 R4.1 | length 10.8
  TopLayer w0.127: R4.1 50.383,40.157 JP1.1 ; 48.71,40.157 ccw(c48.71,41.852) JP1.1@49.908,40.654 ; 48.762,40.157 cw(c48.762,38.537) JP1.1@49.908,39.683 ; 49.017,40.157 ccw(c49.017,41.545) JP1.1@49.998,40.564 ; 49.069,40.157 cw(c49.069,38.844) JP1.1@49.998,39.773 ; 49.323,40.157 ccw(c49.323,41.238) JP1.1@50.088,40.474 ; 49.376,40.157 cw(c49.376,39.15) JP1.1@50.088,39.862 ; 49.63,40.157 ccw(c49.63,40.932) JP1.1@50.178,40.384
NetR8_1: R8.1 U3.6 | length 8
  TopLayer w0.254: U3.6 31.269,17.325 v1(33.275,17.325) ; v1@33.149,17.199 ccw(c32.846,16.896) 32.846,17.325 ccw(c32.846,17.754) v1@33.149,17.451
  BottomLayer w0.254: R8.1 32.283,16.333 v1(33.275,17.325) ; v1@33.097,17.325 cw(c32.668,17.325) 32.971,17.021 cw(c33.275,16.718) v1@33.275,17.147
NetR9_1: R9.1 U3.7 | length 11.7
  TopLayer w0.254: U3.7 31.284,18.575 v1(33.275,18.575) ; v1@33.149,18.449 ccw(c32.846,18.146) 32.846,18.575 ccw(c32.846,19.004) v1@33.149,18.701
  BottomLayer w0.254: R9.1 32.672,18.575 v1(33.275,18.575) ; v1@33.149,18.449 ccw(c32.846,18.146) 32.846,18.575 ccw(c32.846,19.004) v1@33.149,18.701
NetR10_2: R10.2 U3.2 | length 2.3
  TopLayer w0.254: R10.2 22.606,18.593 U3.2
NetR21_1: R21.1 V1.B | length 2.7
  TopLayer w0.127: V1.B 14.491,35.547 R21.1
OSC_IN: C9.2 G1.1 R7.1 U1.5 | length 10.6
  TopLayer w0.127: U1.5 36.481,43.885 R7.1 37.106,43.609 39.526,43.609 40.844,42.291 G1.1 ; G1.1@40.488,41.834 G1.1 ; C9.2 41.961,43.307 G1.1
OSC_OUT: C10.1 G1.3 R7.2 U1.6 | length 10.6
  TopLayer w0.127: U1.6 36.485,44.385 R7.2 37.635,44.831 G1.3 ; G1.3@39.141,46.338 G1.3 ; C10.1 42.515,44.623 40.062,44.623 G1.3
RESET: C8.1 R3.1 R4.2 U1.7 VD7.A | length 20.1
  TopLayer w0.127: U1.7 35.589,44.885 37.963,47.259 43.216,47.259 R3.1 44.831,44.044 C8.1 ; C8.1@44.856,44.128 C8.1 ; R4.2@45.187,40.056 R4.2@45.237,40.107 ; R4.2 46.914,41.885 VD7.A 45.441,44.018 C8.1
SOC0: HL4.1 U1.55 | length 41.2
  TopLayer w0.127: v1@21.079,20.292 ccw(c20.856,20.586) 21.225,20.586 ; v1(21.225,20.1) 21.225,20.586 ; v1@21.371,20.292 cw(c21.594,20.586) 21.225,20.586 ; U1.55 27.235,26.596 25.235,24.596 21.225,20.586
  BottomLayer w0.127: HL4.1 20.581,15.208 20.581,19.456 v1(21.225,20.1) ; HL4.1@13.806,8.742 ccw(c13.806,9.489) 14.334,8.961 ccw(c14.863,8.433) HL4.1@14.115,8.433 ; HL4.1@13.806,8.869 ccw(c13.806,9.923) 14.551,9.178 ccw(c15.296,8.433) HL4.1@14.242,8.433 ; v1@20.984,20.1 cw(c20.401,20.1) 20.813,19.688 cw(c21.225,19.276) v1@21.225,19.859
SOC1: HL4.3 U1.54 | length 43.5
  TopLayer w0.127: v1(20.2,20.1) 26.735,26.635 U1.54 ; v1@20.2,20.341 ccw(c20.2,20.924) 20.612,20.512 ccw(c21.024,20.1) v1@20.441,20.1
  BottomLayer w0.127: HL4.3 12.271,9.498 14.322,9.498 ; HL4.3@11.206,8.742 ccw(c11.206,9.489) 11.734,8.961 ccw(c12.263,8.433) HL4.3@11.515,8.433 ; HL4.3@11.206,8.869 ccw(c11.206,9.923) 11.951,9.178 ccw(c12.696,8.433) HL4.3@11.642,8.433 ; 14.327,9.493 20.2,15.366 v1(20.2,20.1) ; v1@20.029,19.929 cw(c19.617,19.517) 20.2,19.517 cw(c20.783,19.517) v1@20.371,19.929
SOC2: HL4.4 U1.53 | length 45.2
  TopLayer w0.127: v1(19.175,20.1) v1@19.2,20.125 ; v1@19.175,20.125 v1@19.2,20.125 ; v1@19.175,20.341 ccw(c19.175,20.924) 19.587,20.512 ccw(c19.999,20.1) v1@19.416,20.1 ; 24.235,24.674 24.168,24.607 ; U1.53 26.235,26.674 24.168,24.607 ; v1@19.2,20.125 20.093,21.018 20.579,21.018 24.168,24.607
  BottomLayer w0.127: HL4.4 11.352,9.879 14.175,9.879 19.819,15.523 19.819,19.456 v1(19.175,20.1) ; HL4.4@9.906,8.742 ccw(c9.906,9.489) 10.434,8.961 ccw(c10.963,8.433) HL4.4@10.215,8.433 ; HL4.4@9.906,8.869 ccw(c9.906,9.923) 10.651,9.178 ccw(c11.396,8.433) HL4.4@10.342,8.433 ; v1@19.175,19.859 cw(c19.175,19.276) 19.587,19.688 cw(c19.999,20.1) v1@19.416,20.1
SWCLK: JP1.2 R5.1 U1.49 | length 42.3
  TopLayer w0.127: U1.49 24.235,41.846 32.427,50.038 45.517,50.038 R5.1 46.736,48.466 49.261,45.941 49.261,43.801 ; JP1.2@49.707,42.685 ccw(c48.182,42.722) 49.261,43.801 ; JP1.2@49.834,42.682 ccw(c48.591,42.712) 49.47,43.591 ccw(c50.35,44.471) JP1.2@50.38,43.228 ; JP1.2@49.961,42.679 ccw(c49,42.702) 49.68,43.382 ccw(c50.36,44.062) JP1.2@50.383,43.101 ; JP1.2@50.377,43.354 cw(c50.34,44.88) 49.261,43.801 ; JP1.2 49.261,43.801
SWDIO: JP1.4 R6.1 U1.46 | length 39.9
  TopLayer w0.127: U1.46 24.735,42.885 32.269,50.419 R6.1 47.434,49.721 47.434,48.306 48.073,47.668 JP1.4 ; JP1.4@49.908,47.183 ccw(c48.736,46.011) 48.736,47.668 ccw(c48.736,49.326) JP1.4@49.908,48.154 ; JP1.4@49.998,47.273 ccw(c49.043,46.317) 49.043,47.668 ccw(c49.043,49.019) JP1.4@49.998,48.064 ; JP1.4@50.088,47.362 ccw(c49.349,46.624) 49.349,47.668 ccw(c49.349,48.712) JP1.4@50.088,47.974
USBD+: JP2.3 U2.1 | length 4.7
  TopLayer w0.254: JP2.3 8.57,14.453 9.068,14.95 U2.1 ; JP2.3@7.411,14.153 cw(c8.133,13.431) 8.133,14.453 cw(c8.133,15.474) JP2.3@7.411,14.752
USBD-: JP2.2 U2.2 | length 8.1
  TopLayer w0.254: JP2.2@5.638,15.574 ccw(c5.13,16.169) 5.912,16.169 ; JP2.2 5.912,16.169 ; JP2.2@6.186,15.574 cw(c6.694,16.169) 5.912,16.169 ; U2.2 10.338,16.725 9.892,17.17 6.913,17.17 5.912,16.169
pads on no net: JP2.0 JP2.4 JP4.0 JP4.1 JP4.2 JP4.4 JP4.5 JP4.10 K2.1 K2.4 K2.5 K2.6 U1.2 U1.3 U1.4 U1.8 U1.9 U1.10 U1.11 U1.14 U1.17 U1.24 U1.25 U1.26 U1.27 U1.28 U1.29 U1.33 U1.34 U1.35 U1.36 U1.37 U1.38 U1.39 U1.40 U1.41 U1.42 U1.43 U1.44 U1.50 U1.56 U2.4 U3.0
copper on no net:
  other v2: 27.442,16.758 28.642,16.758 27.442,17.958 28.642,17.958 27.442,19.158 28.642,19.158

## Polygon pours and split planes (outlines as drawn)
DGND on TopLayer "TopLayer-No Net" (solid, remove dead copper, pour order 1000): 0,0 57.506,0 57.506,62.509 0,62.509 0,0
DGND on BottomLayer "TopLayer-No Net" (solid, remove dead copper, pour order 1001): 0,0 57.506,0 57.506,62.509 0,62.509 0,0

## Keep-outs
TopLayer:
  circle w0.127: c10,59.25 r1.397
  circle w0.127: c47.5,59.25 r1.397
  circle w0.127: c47.5,3.25 r1.397
  circle w0.127: c3.475,22.3 r1.397
BottomLayer:
  circle w0.127: c10,59.25 r1.397
  circle w0.127: c47.5,59.25 r1.397
  circle w0.127: c47.5,3.25 r1.397
  circle w0.127: c3.475,22.3 r1.397
KeepOutLayer:
  lines w0.127: 0,5 ccw(c5,5) 5,0 52.5,0 ccw(c52.5,5) 57.5,5 57.5,57.5 ccw(c52.5,57.5) 52.5,62.5 5,62.5 ccw(c5,57.5) 0,57.5 0,5

## Silkscreen, mask and mechanical layers (free items; w line width, h text height)
TopOverlay:
  circle w0.254: c52,59.25 r2.5
  circle w0.254: c5.5,59.25 r2.5
  circle w0.254: c52,3.25 r2.5
  circle w0.254: c5.5,3.25 r2.5
  text "R" at 51.496,49.827 h0.76
  text "D" at 51.689,47.32 h0.76
  text "G" at 51.765,44.806 h0.76
  text "C" at 51.714,42.266 h0.76
  text "V" at 51.765,39.776 h0.76
  text "B+" at 49.327,11.989 h0.76 r270
  text "B-" at 49.251,9.525 h0.76 r270
  text "HGD_MCU(v0.1)-20200807" at 20.752,2.845 h0.76
BottomOverlay:
  circle w0.254: c52,59.25 r2.5
  circle w0.254: c5.5,59.25 r2.5
  circle w0.254: c52,3.25 r2.5
  circle w0.254: c5.5,3.25 r2.5
  text "HGD_MCU(v0.1)-20200807" at 36.754,2.845 h0.76

## Text inside footprints (layer, text, board x,y; h text height)
M1: BottomOverlay "GND" at 4.515,32.487 h0.76 r270; BottomOverlay "GND" at 4.515,34.987 h0.76 r270; BottomOverlay "GND" at 4.515,37.487 h0.76 r270; BottomOverlay "ANT" at 0.89,25.337 h0.76 r270; BottomOverlay "M0" at 33.249,38.379 h0.76; BottomOverlay "RXD" at 33.325,33.274 h0.76; BottomOverlay "TXD" at 33.354,30.785 h0.76; BottomOverlay "AUX" at 33.299,28.27 h0.76; BottomOverlay "VCC" at 33.172,25.603 h0.76; BottomOverlay "GND" at 33.223,23.139 h0.76